# EAGLE board Board_proiect_ (EAGLE 9.7.0)
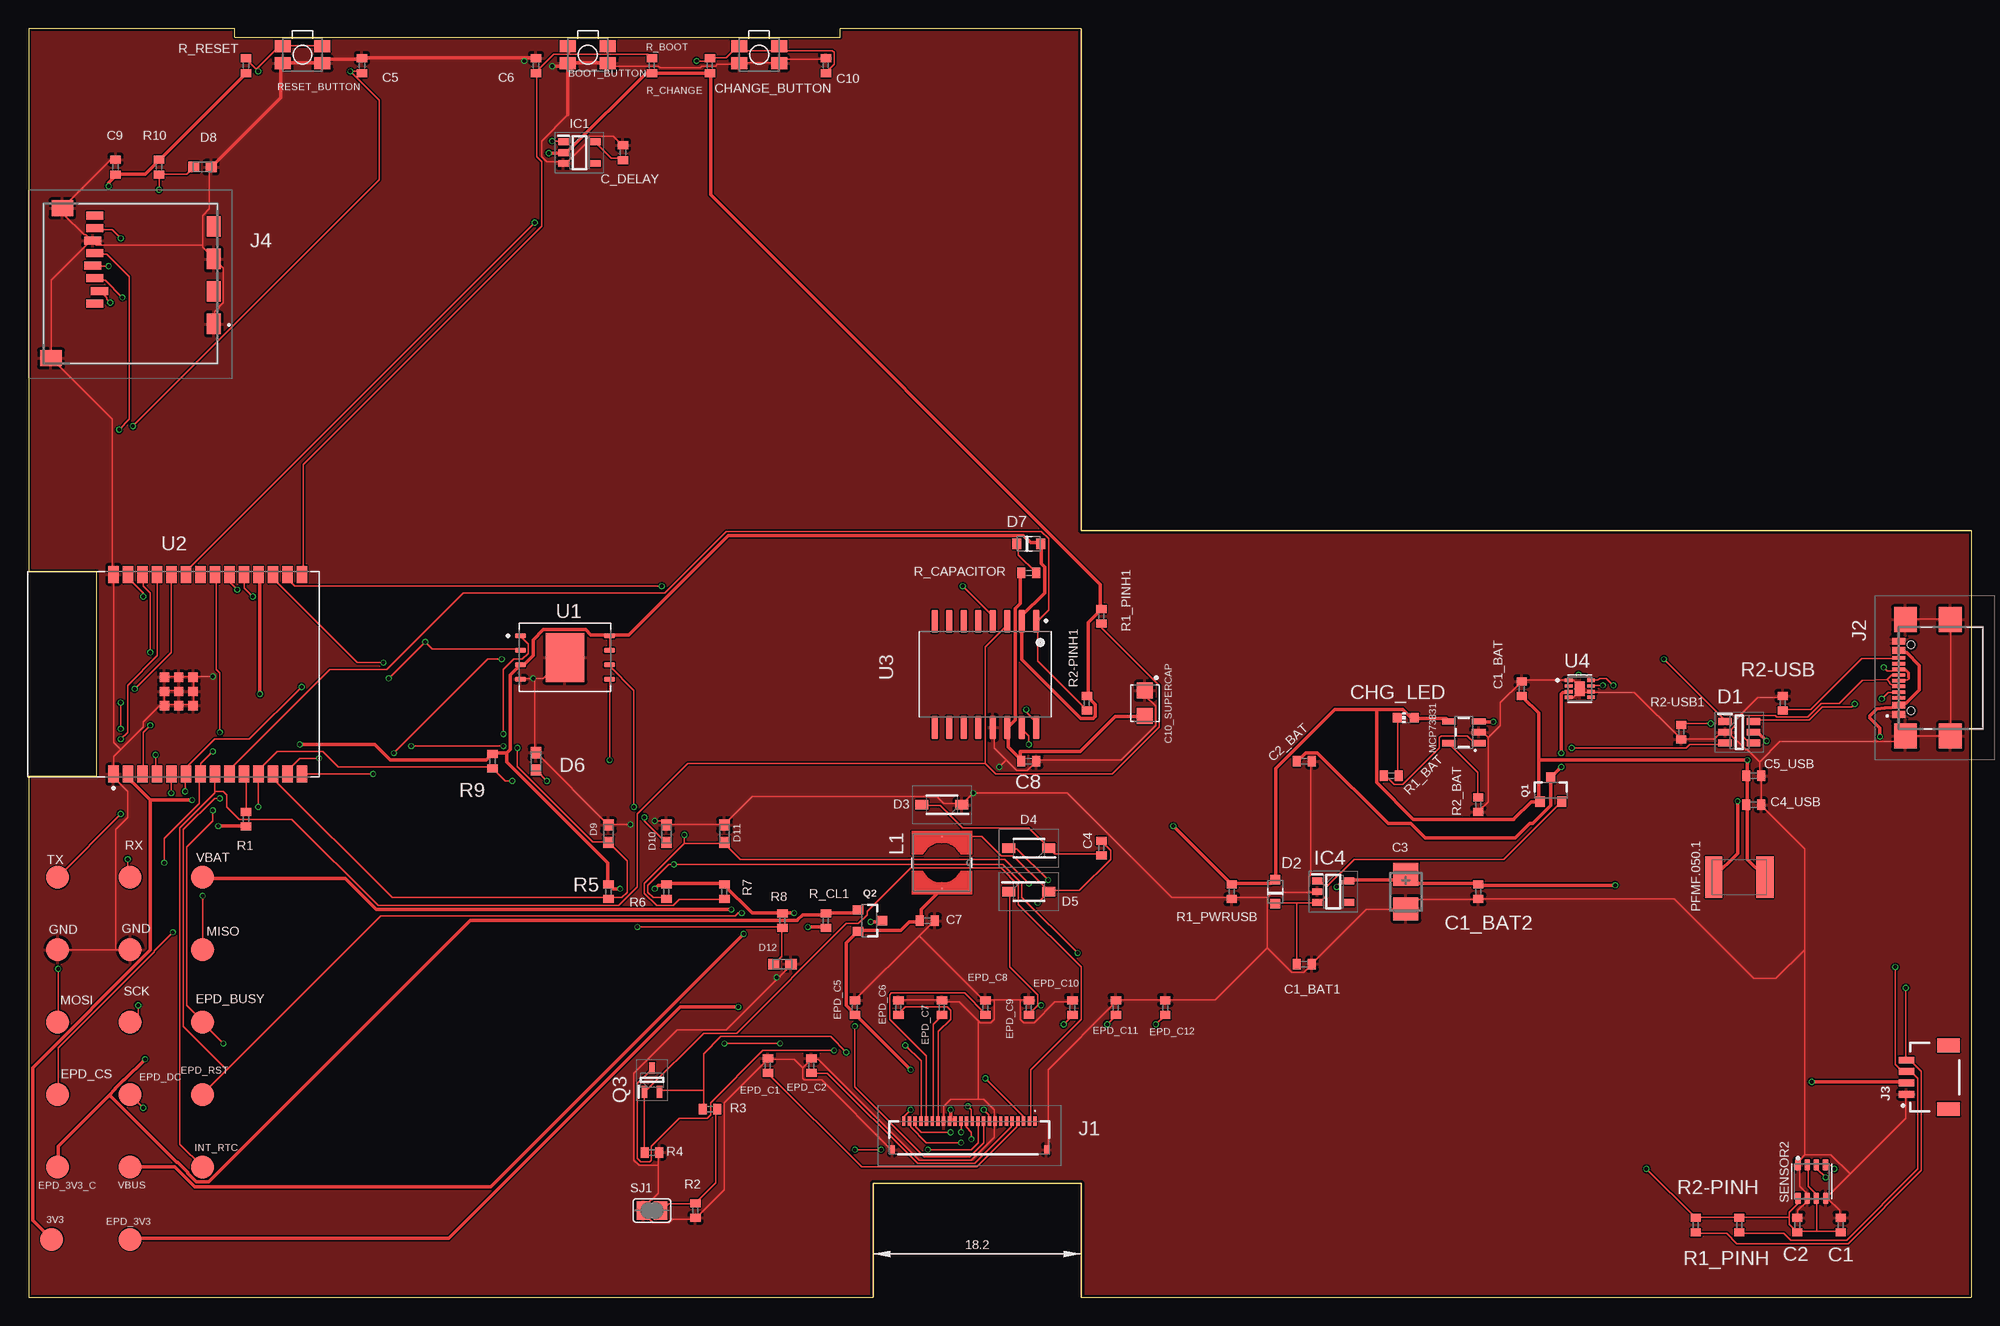
[diagram p0: board, top side]
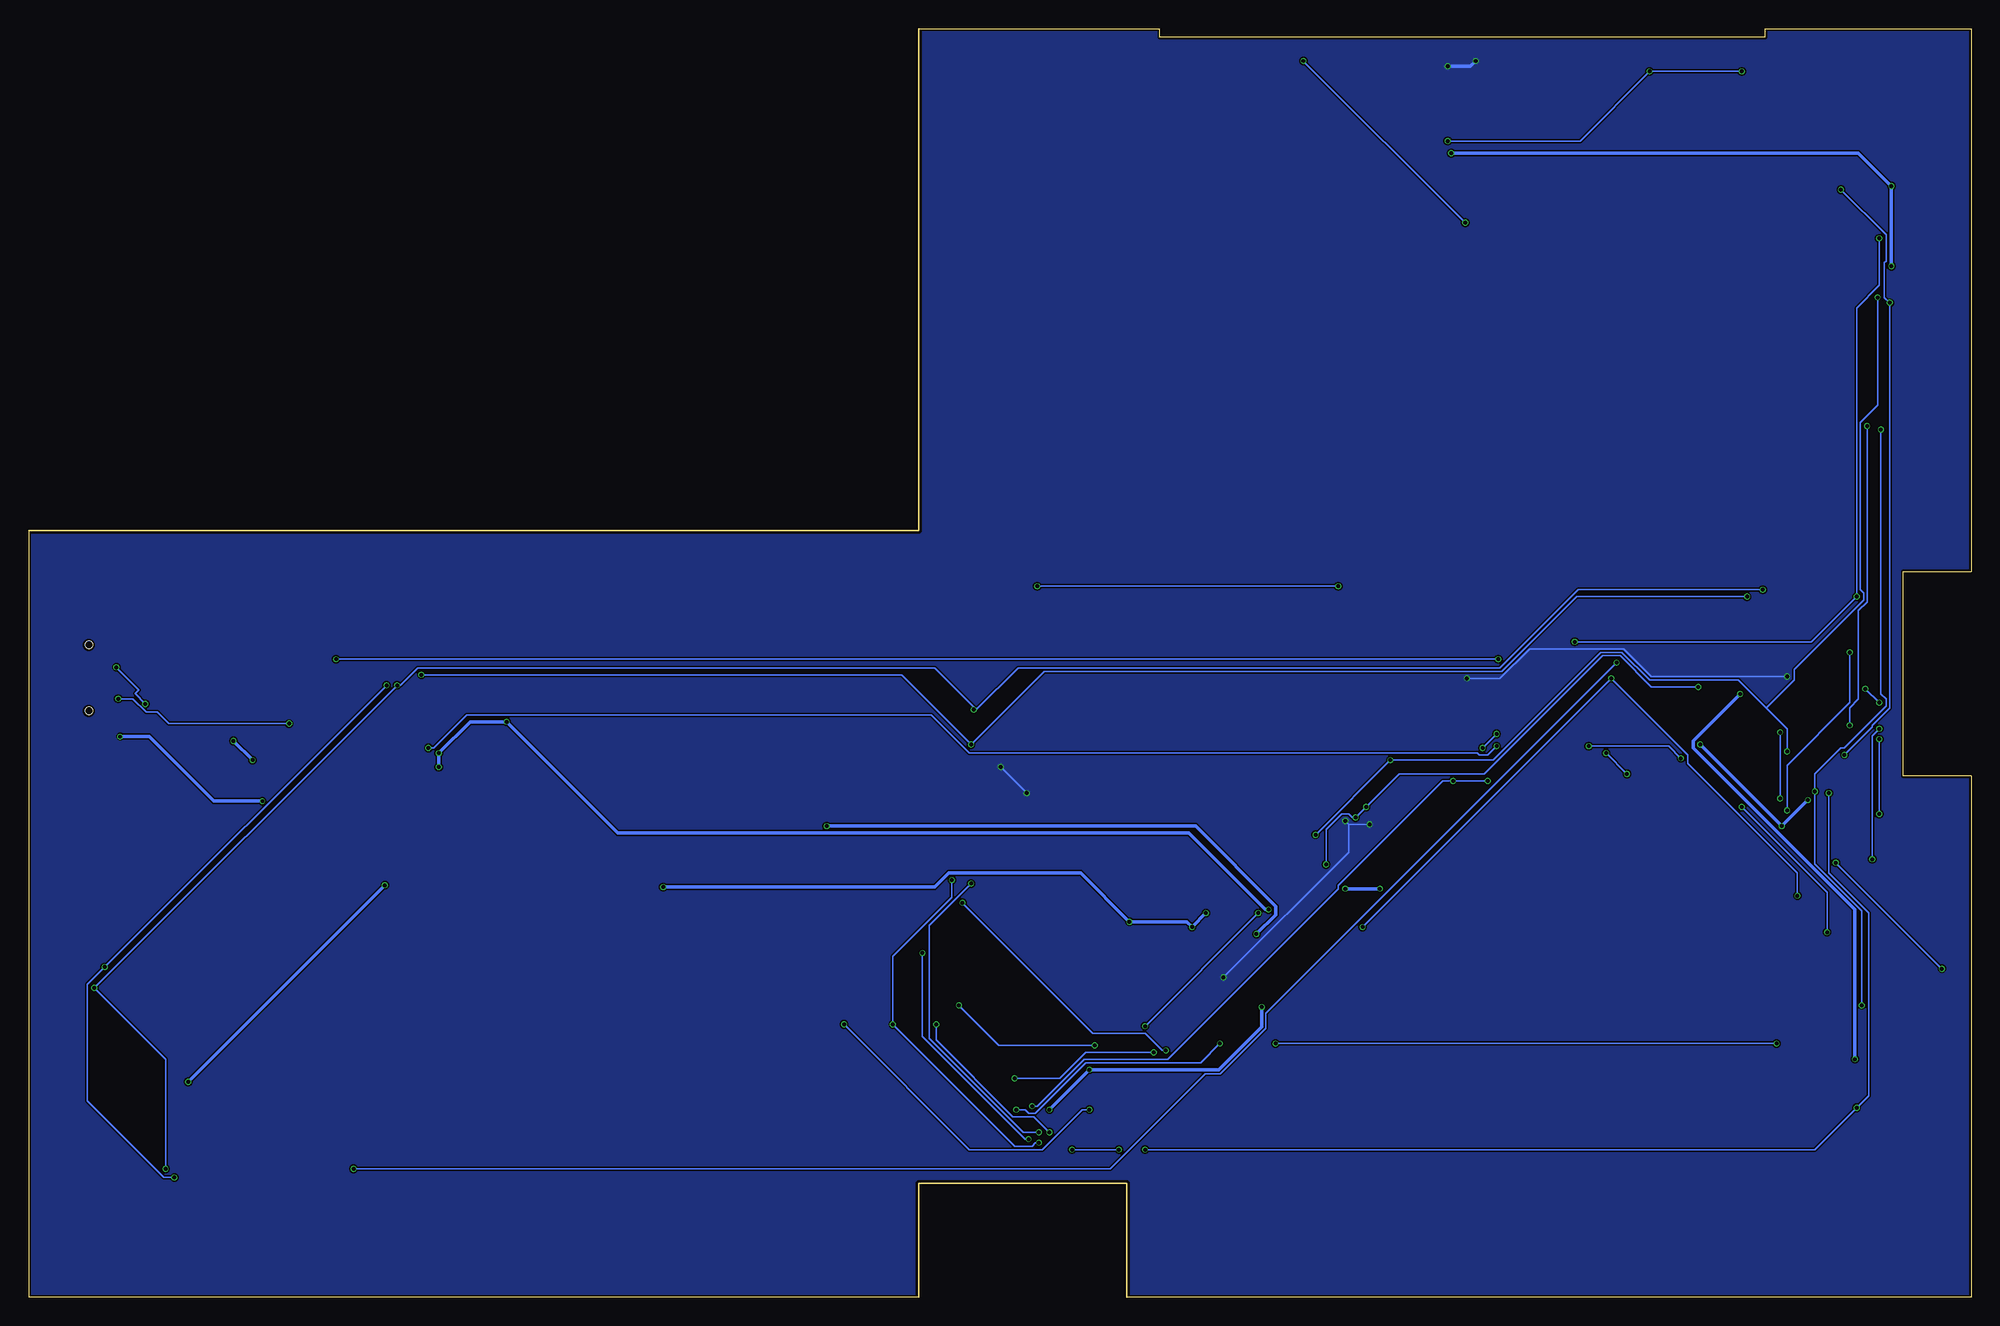
[diagram p1: board, bottom side, seen from below]

Size 170.2 x 111.2 mm. Coordinates in mm from the lower left corner, seen from the top.
Outline: 0,0 74,0 74,10 92.2,10 92.2,0 170.2,0 170.2,67.2 92.2,67.2 92.2,111.2 71.12,111.2 71.12,110.42 18.08,110.42 18.08,111.2 0,111.2 0,63.6 5.97,63.6 5.97,45.72 0,45.72 0,0
Copper layers (1*16): Top 0.035mm / dielectric 1.6mm / Bottom 0.035mm
Design rules "jlcpcb-2layers.dru *": minimum track width 5mil, minimum drill 0.3mm, track to track 5mil, track to pad 5mil, pad to pad 5mil, via to via 5mil, smd to smd 5mil, copper to edge 0.2mm, drill to drill 6mil, minimum pad ring 10mil, minimum via ring 3mil, stop-mask expansion 4mil, vias tented up to drill 0mil, thermal gap 10mil

## Footprints (pad centres in the part's own frame; a part is rotated, then mirrored left to right if it is on the bottom)
MYBUTTON = smd 1.4 x 1.05: 1 1.75,0.75; 2 -1.75,0.75; 3 -1.75,-0.75; 4 1.75,-0.75
ESP32_WROVER_EAGLE-LTSPICE_C0402 = smd 0.7 x 0.9: 1 -0.65,0; 2 0.65,0
EAGLE-LTSPICE_C0402 = smd 0.7 x 0.9: 1 -0.65,0; 2 0.65,0
RCL_CT3528 = smd 2 x 2.2: + -1.5,0; - 1.5,0
CAPCP3225X100N = smd 1.4 x 1.4: 1 -1.1,0; 2 1.1,0
ADAFRUIT_CHIP-LED0603 = smd 0.8 x 0.8: A 0,-0.75; C 0,0.75
SOT95P280X145-6N = smd 1.2 x 0.6: 1 -1.25,0.95; 2 -1.25,0; 3 -1.25,-0.95; 4 1.25,-0.95; 5 1.25,0; 6 1.25,0.95
ESP32_WROVER_AVX---SD0805S020S1R0_AVX_SD0805S020S1R0_0 = smd 0.8 x 0.9: 1 -1.05,0; 2 1.05,0
SOD3716X135N = smd 1.15 x 0.8: 1 -1.75,0; 2 1.75,0
DIOC1608X36N = smd 0.97 x 0.94: 1 -0.75,0; 2 0.75,0
SOT95P280X125-5N = smd 0.9 x 0.6: 1 -1.4,0.95; 2 -1.4,0; 3 -1.4,-0.95; 4 1.4,-0.95; 5 1.4,0.95
SOT95P280X120-5N = smd 0.9 x 0.6: 1 -1.4,0.95; 2 -1.4,0; 3 -1.4,-0.95; 4 1.4,-0.95; 5 1.4,0.95
FH34SRJ24S05SH99 = smd 0.3 x 0.8: 1 5.75,1.45; 2 5.25,1.45; 3 4.75,1.45; 4 4.25,1.45; 5 3.75,1.45; 6 3.25,1.45; 7 2.75,1.45; 8 2.25,1.45; 9 1.75,1.45; 10 1.25,1.45; 11 0.75,1.45; 12 0.25,1.45; 13 -0.25,1.45; 14 -0.75,1.45; 15 -1.25,1.45; 16 -1.75,1.45; 17 -2.25,1.45; 18 -2.75,1.45; 19 -3.25,1.45; 20 -3.75,1.45; 21 -4.25,1.45; 22 -4.75,1.45; 23 -5.25,1.45; 24 -5.75,1.45 | smd 0.4 x 0.8: MP1 6.75,-1.05; MP2 -6.75,-1.05
SAMACSYS_PARTS_USB4110GFA = smd 0.3 x 1.15: A1 -3.35,3.678; A4 -2.55,3.678; A5 -1.25,3.678; A6 -0.25,3.678; A7 0.25,3.678; A8 1.25,3.678; A9 2.55,3.678; A12 3.35,3.678; B1 3.05,3.678; B4 2.25,3.678; B5 1.75,3.678; B6 0.75,3.678; B7 -0.75,3.678; B8 -1.75,3.678; B9 -2.25,3.678; B12 -3.05,3.678 | smd 2.18 x 2: MP1 -5.11,-0.827; MP2 5.11,-0.827; MP3 -5.11,3.103; MP4 5.11,3.103 | hole 0.65: -2.89,2.603; 2.89,2.603
JST04_1MM_RA = smd 0.6 x 1.35: 1 -1.5,0; 2 -0.5,0; 3 0.5,0; 4 1.5,0 | smd 1.2 x 2: NC1 2.8,-3.675; NC2 -2.8,-3.675
112ATAARR03ATTEND = smd 1.8 x 1.2: G1 10.6,10.4; G2 4.9,10.4; S1 7.75,10.4; S2 2.05,10.4 | smd 1.4 x 1.9: G3 13.6,-3.85; G4 0.45,-2.85 | smd 0.7 x 1.5: P1 8.8,0; P2 7.7,0.4; P3 6.6,0; P4 5.5,-0.2; P5 4.4,0; P6 3.3,-0.2; P7 2.2,0; P8 1.1,0
IND_4828-WE-TPC_WRE = smd 0.127 x 0.127: 1 -2.286,0; 2 2.286,0
ESP32_WROVER_SPARKFUN-IC-POWER_SOT23-5 = smd 0.55 x 1.2: 1 -0.95,-1.3; 2 0,-1.3; 3 0.95,-1.3; 4 0.95,1.3; 5 -0.95,1.3
ESP32C6_VARISTOR_CT/CN1812 = smd 1.5 x 3.6: 1 -2.25,0; 2 2.25,0
ESP32_WROVER_SPARKFUN-DISCRETESEMI_SOT23-3 = smd 0.8 x 0.9: 1 -0.95,-1; 2 0.95,-1; 3 0,1.1
SOT65P210X110-3N = smd 1.05 x 0.5: 1 -1.05,0.65; 2 -1.05,-0.65; 3 1.05,0
ESP32_WROVER_EAGLE-LTSPICE_R0402 = smd 0.7 x 0.9: 1 -0.65,0; 2 0.65,0
ESP32_WROVER_BME680_PSON80P300X300X100-8N = smd 1.016 x 0.5: 1 1.458,1.2; 2 1.458,0.4; 3 1.458,-0.4; 4 1.458,-1.2; 5 -1.458,-1.22; 6 -1.458,-0.4; 7 -1.458,0.4; 8 -1.458,1.2
SJ = smd 1.168 x 1.6: 1 -0.762,0; 2 0.762,0
TP20R = smd 2 x 2: TP 0,0
SON127P600X800X80-9N = smd 0.94 x 0.44: 1 -3.895,1.905; 2 -3.895,0.635; 3 -3.895,-0.635; 4 -3.895,-1.905; 5 3.895,-1.905; 6 3.895,-0.635; 7 3.895,0.635; 8 3.895,1.905 | smd 3.4 x 4.3: 9 0,0
XCVR_ESP32-C6-WROOM-1-N8 = smd 1.5 x 0.9: 1 -8.75,5.26; 2 -8.75,3.99; 3 -8.75,2.72; 4 -8.75,1.45; 5 -8.75,0.18; 6 -8.75,-1.09; 7 -8.75,-2.36; 8 -8.75,-3.63; 9 -8.75,-4.9; 10 -8.75,-6.17; 11 -8.75,-7.44; 12 -8.75,-8.71; 13 -8.75,-9.98; 14 -8.75,-11.25; 15 8.75,-11.25; 16 8.75,-9.98; 17 8.75,-8.71; 18 8.75,-7.44; 19 8.75,-6.17; 20 8.75,-4.9; 21 8.75,-3.63; 22 8.75,-2.36; 23 8.75,-1.09; 24 8.75,0.18; 25 8.75,1.45; 26 8.75,2.72; 27 8.75,3.99; 28 8.75,5.26 | smd 0.8 x 0.8: 29_1 -2.755,0.79; 29_2 -1.505,0.79; 29_3 -0.255,0.79; 29_4 -2.755,-0.46; 29_5 -1.505,-0.46; 29_6 -0.255,-0.46; 29_7 -2.755,-1.71; 29_8 -1.505,-1.71; 29_9 -0.255,-1.71
SOIC127P1032X265-16N = smd 2.05 x 0.59: 1 -4.655,4.445; 2 -4.655,3.175; 3 -4.655,1.905; 4 -4.655,0.635; 5 -4.655,-0.635; 6 -4.655,-1.905; 7 -4.655,-3.175; 8 -4.655,-4.445; 9 4.655,-4.445; 10 4.655,-3.175; 11 4.655,-1.905; 12 4.655,-0.635; 13 4.655,0.635; 14 4.655,1.905; 15 4.655,3.175; 16 4.655,4.445
SON50P200X200X80-9N = smd 0.76 x 0.27: 1 -0.985,0.75; 2 -0.985,0.25; 3 -0.985,-0.25; 4 -0.985,-0.75; 5 0.985,-0.75; 6 0.985,-0.25; 7 0.985,0.25; 8 0.985,0.75 | smd 0.9 x 1.3: 9 0,0

## Placement (x,y rotation side)
BOOT_BUTTON  BUTTON_CUSYOMV1  [MYBUTTON]  49,108.91 180 top
C1  100nF  [ESP32_WROVER_EAGLE-LTSPICE_C0402]  158.75,6.35 90 top
C1_BAT  4.7uF  [ESP32_WROVER_EAGLE-LTSPICE_C0402]  130.81,53.34 90 top
C1_BAT1  4.7uF  [ESP32_WROVER_EAGLE-LTSPICE_C0402]  111.76,29.21 0 top
C1_BAT2  4.7uF  [EAGLE-LTSPICE_C0402]  127,35.56 270 top
C2  100nF  [ESP32_WROVER_EAGLE-LTSPICE_C0402]  154.94,6.35 90 top
C2_BAT  4.7uF  [ESP32_WROVER_EAGLE-LTSPICE_C0402]  111.76,46.99 0 top
C3  100uF TANT  [RCL_CT3528]  120.65,35.56 270 top
C4  4.7uF/25V  [ESP32_WROVER_EAGLE-LTSPICE_C0402]  93.98,39.37 90 top
C4_USB  100nF  [ESP32_WROVER_EAGLE-LTSPICE_C0402]  151.13,43.18 0 top
C5  1uF  [ESP32_WROVER_EAGLE-LTSPICE_C0402]  29.21,107.95 90 top
C5_USB  4.7uF  [ESP32_WROVER_EAGLE-LTSPICE_C0402]  151.13,45.72 0 top
C6  100nF  [ESP32_WROVER_EAGLE-LTSPICE_C0402]  44.45,107.95 90 top
C7  10uF  [ESP32_WROVER_EAGLE-LTSPICE_C0402]  78.74,33.02 0 top
C8  100nF  [ESP32_WROVER_EAGLE-LTSPICE_C0402]  87.63,46.99 0 top
C9  100nF  [ESP32_WROVER_EAGLE-LTSPICE_C0402]  7.62,99.06 90 top
C10  100nF  [ESP32_WROVER_EAGLE-LTSPICE_C0402]  69.85,107.95 90 top
C10_SUPERCAP  CPH3225A  [CAPCP3225X100N]  97.79,52.07 270 top
C_DELAY  100nF  [ESP32_WROVER_EAGLE-LTSPICE_C0402]  52.07,100.33 90 top
CHANGE_BUTTON  BUTTON_CUSYOMV1  [MYBUTTON]  64,108.91 180 top
CHG_LED  [ADAFRUIT_CHIP-LED0603]  120.65,50.8 90 top
D1  USBLC6-2SC6Y  [SOT95P280X145-6N]  149.86,49.53 0 top
D2  ESP32_WROVER_AVX---SD0805S020S1R0_AVX_SD0805S020S1R0_0_0AVX_SD0805S020S1R0_0_0  [ESP32_WROVER_AVX---SD0805S020S1R0_AVX_SD0805S020S1R0_0]  109.22,35.56 90 top
D3  MBR0530  [SOD3716X135N]  80.01,43.18 180 top
D4  MBR0530  [SOD3716X135N]  87.63,39.37 180 top
D5  MBR0530  [SOD3716X135N]  87.63,35.56 0 top
D6  PGB1010603MR  [DIOC1608X36N]  44.45,46.99 90 top
D7  ESP32_WROVER_AVX---SD0805S020S1R0_AVX_SD0805S020S1R0_0_0AVX_SD0805S020S1R0_0_0  [ESP32_WROVER_AVX---SD0805S020S1R0_AVX_SD0805S020S1R0_0]  87.63,66.04 0 top
D8  PGB1010603MR  [DIOC1608X36N]  15.24,99.06 0 top
D9  PGB1010603MR  [DIOC1608X36N]  50.8,40.64 90 top
D10  PGB1010603MR  [DIOC1608X36N]  55.88,40.64 90 top
D11  PGB1010603MR  [DIOC1608X36N]  60.96,40.64 90 top
D12  PGB1010603MR  [DIOC1608X36N]  66.04,29.21 0 top
EPD_C1  1uF/50V  [ESP32_WROVER_EAGLE-LTSPICE_C0402]  64.77,20.32 90 top
EPD_C2  1uF/50V  [ESP32_WROVER_EAGLE-LTSPICE_C0402]  68.58,20.32 90 top
EPD_C5  0.1uF/50V  [ESP32_WROVER_EAGLE-LTSPICE_C0402]  72.39,25.4 90 top
EPD_C6  1uF/50V  [ESP32_WROVER_EAGLE-LTSPICE_C0402]  76.2,25.4 90 top
EPD_C7  1uF/50V  [ESP32_WROVER_EAGLE-LTSPICE_C0402]  80.01,25.4 90 top
EPD_C8  1uF/50V  [ESP32_WROVER_EAGLE-LTSPICE_C0402]  83.82,25.4 90 top
EPD_C9  1uF/50V  [ESP32_WROVER_EAGLE-LTSPICE_C0402]  87.63,25.4 90 top
EPD_C10  1uF/50V  [ESP32_WROVER_EAGLE-LTSPICE_C0402]  91.44,25.4 90 top
EPD_C11  1uF/50V  [ESP32_WROVER_EAGLE-LTSPICE_C0402]  95.25,25.4 90 top
EPD_C12  1uF/50V  [ESP32_WROVER_EAGLE-LTSPICE_C0402]  99.58,25.4 90 top
IC1  BD5229G-TR  [SOT95P280X125-5N]  48.26,100.33 0 top
IC4  XC6220A331MR-G  [SOT95P280X120-5N]  114.3,35.56 0 top
J1  FH34SRJ-24S-0.5SH_99_  [FH34SRJ24S05SH99]  82.42,14 0 top
J2  SAMACSYS_PARTS_USB4110-GF-A  [SAMACSYS_PARTS_USB4110GFA]  167.52,54.3 90 top
J3  QWIIC_RIGHT_ANGLE  [JST04_1MM_RA]  164.51,19.3 90 top
J4  112A-TAAR-R03_ATTEND  [112ATAARR03ATTEND]  5.82,95.9 270 top
L1  68uH  [IND_4828-WE-TPC_WRE]  80.01,38.1 270 top
MCP73831  MCP73831  [ESP32_WROVER_SPARKFUN-IC-POWER_SOT23-5]  125.73,49.53 90 top
PFMF.050.1  ESP32C6_VARISTORCN1812  [ESP32C6_VARISTOR_CT/CN1812]  149.86,36.83 0 top
Q1  20V/4.2A/52mΩ/1.4W  [ESP32_WROVER_SPARKFUN-DISCRETESEMI_SOT23-3]  133.35,44.45 0 top
Q2  20V/4.2A/52mΩ/1.4W  [ESP32_WROVER_SPARKFUN-DISCRETESEMI_SOT23-3]  73.66,33.02 270 top
Q3  SI1308EDL-T1-GE3  [SOT65P210X110-3N]  54.61,19.05 90 top
R1  10K  [ESP32_WROVER_EAGLE-LTSPICE_R0402]  19.05,41.91 90 top
R1_BAT  200  [ESP32_WROVER_EAGLE-LTSPICE_R0402]  119.38,45.72 0 top
R1_PINH  10K  [ESP32_WROVER_EAGLE-LTSPICE_R0402]  149.86,6.35 90 top
R1_PINH1  10K  [ESP32_WROVER_EAGLE-LTSPICE_R0402]  93.98,59.69 90 top
R1_PWRUSB  100K  [ESP32_WROVER_EAGLE-LTSPICE_R0402]  105.41,35.56 90 top
R2  2.2  [ESP32_WROVER_EAGLE-LTSPICE_R0402]  58.42,7.62 90 top
R2-PINH  10K  [ESP32_WROVER_EAGLE-LTSPICE_R0402]  146.05,6.35 90 top
R2-PINH1  10K  [ESP32_WROVER_EAGLE-LTSPICE_R0402]  92.71,52.07 90 top
R2-USB  5K1  [ESP32_WROVER_EAGLE-LTSPICE_R0402]  153.67,52.07 90 top
R2-USB1  5K1  [ESP32_WROVER_EAGLE-LTSPICE_R0402]  144.78,49.53 90 top
R2_BAT  2K  [ESP32_WROVER_EAGLE-LTSPICE_R0402]  127,43.18 90 top
R3  0.47  [ESP32_WROVER_EAGLE-LTSPICE_R0402]  59.69,16.51 0 top
R4  10K  [ESP32_WROVER_EAGLE-LTSPICE_R0402]  54.61,12.7 0 top
R5  10K  [ESP32_WROVER_EAGLE-LTSPICE_R0402]  50.8,35.56 90 top
R6  10K  [ESP32_WROVER_EAGLE-LTSPICE_R0402]  55.88,35.56 90 top
R7  10K  [ESP32_WROVER_EAGLE-LTSPICE_R0402]  60.96,35.56 90 top
R8  10K  [ESP32_WROVER_EAGLE-LTSPICE_R0402]  66.04,33.02 90 top
R9  10K  [ESP32_WROVER_EAGLE-LTSPICE_R0402]  40.64,46.99 90 top
R10  10K  [ESP32_WROVER_EAGLE-LTSPICE_R0402]  11.43,99.06 90 top
R_BOOT  10K  [ESP32_WROVER_EAGLE-LTSPICE_R0402]  54.61,107.95 90 top
R_CAPACITOR  15  [ESP32_WROVER_EAGLE-LTSPICE_R0402]  87.63,63.5 180 top
R_CHANGE  10K  [ESP32_WROVER_EAGLE-LTSPICE_R0402]  59.69,107.95 90 top
R_CL1  10K  [ESP32_WROVER_EAGLE-LTSPICE_R0402]  69.85,33.02 90 top
R_RESET  10K  [ESP32_WROVER_EAGLE-LTSPICE_R0402]  19.05,107.95 90 top
RESET_BUTTON  BUTTON_CUSYOMV1  [MYBUTTON]  24,108.91 180 top
SENSOR2  BME688  [ESP32_WROVER_BME680_PSON80P300X300X100-8N]  156.21,10.16 90 top
SJ1  [SJ]  54.61,7.62 0 top
TP1  TPTP20R  [TP20R]  2.54,36.83 0 top
TP2  TPTP20R  [TP20R]  8.89,36.83 0 top
TP3  TPTP20R  [TP20R]  15.24,36.83 0 top
TP4  TPTP20R  [TP20R]  2.54,30.48 0 top
TP5  TPTP20R  [TP20R]  8.89,30.48 0 top
TP6  TPTP20R  [TP20R]  15.24,30.48 0 top
TP7  TPTP20R  [TP20R]  2.54,24.13 0 top
TP8  TPTP20R  [TP20R]  8.89,24.13 0 top
TP9  TPTP20R  [TP20R]  15.24,24.13 0 top
TP10  TPTP20R  [TP20R]  2.54,17.78 0 top
TP11  TPTP20R  [TP20R]  8.89,17.78 0 top
TP12  TPTP20R  [TP20R]  15.24,17.78 0 top
TP13  TPTP20R  [TP20R]  2.54,11.43 0 top
TP14  TPTP20R  [TP20R]  8.89,11.43 0 top
TP15  TPTP20R  [TP20R]  15.24,11.43 0 top
TP16  TPTP20R  [TP20R]  2.02,5.08 0 top
TP17  TPTP20R  [TP20R]  8.89,5.08 0 top
U1  W25Q512JVEIQ  [SON127P600X800X80-9N]  46.99,56.09 0 top
U2  ESP32-C6-WROOM-1-N8  [XCVR_ESP32-C6-WROOM-1-N8]  12.7,54.61 90 top
U3  DS3231SN#  [SOIC127P1032X265-16N]  83.82,54.61 270 top
U4  MAX17048G+T10  [SON50P200X200X80-9N]  135.89,53.34 0 top

## Library data of the parts
BOOT_BUTTON CHANGE_BUTTON CHG_LED PFMF.050.1 RESET_BUTTON SJ1 TP1-TP17 = DeskAssistant v19 v1
C1 C1_BAT C1_BAT1 C1_BAT2 C2 C2_BAT C4 C4_USB C5 C5_USB C6-C10 C_DELAY EPD_C1 EPD_C2 EPD_C5-EPD_C12 = DeskAssistant v19 v1; SPICEMODEL: NONE; SPICEPREFIX: C
C3 = DeskAssistant v19 v1; SPICEPREFIX: C
C10_SUPERCAP = DeskAssistant v19 v1; AVAILABILITY: Not in stock; CHECK_PRICES: https://www.snapeda.com/parts/CPH3225A/Seiko+Instruments/view-part/?ref=eda; DESCRIPTION: 11 mF (EDLC) Supercapacitor 3.3 V 1210 (3225 Metric) - -; MF: Seiko Instruments; MP: CPH3225A; PACKAGE: 1210 Seiko; PRICE: None; PURCHASE-URL: https://www.snapeda.com/api/url_track_click_mouser/?unipart_id=562593&manufacturer=Seiko Instruments&part_name=CPH3225A&search_term=None; SNAPEDA_LINK: https://www.snapeda.com/parts/CPH3225A/Seiko+Instruments/view-part/?ref=snap
D1 = DeskAssistant v19 v1; AVAILABILITY: In Stock; CHECK_PRICES: https://www.snapeda.com/parts/USBLC6-2SC6Y/STMicroelectronics/view-part/?ref=eda; DESCRIPTION: 17V Clamp 5A (8/20µs) Ipp Tvs Diode Surface Mount SOT-23-6; MF: STMicroelectronics; MP: USBLC6-2SC6Y; PACKAGE: SOT-23-6 STMicroelectronics; PRICE: None; SNAPEDA_LINK: https://www.snapeda.com/parts/USBLC6-2SC6Y/STMicroelectronics/view-part/?ref=snap
D2 D7 = DeskAssistant v19 v1; CENTROID_NOT_SPECIFIED: No; DATASHEET: http://datasheets.avx.com/schottky.pdf; DIGIKEY_DESCRIPTION: DIODE SCHOTTKY 20V 1A 0805; DIGIKEY_PART_NUMBER: 478-7800-1-ND; LEAD_FREE: yes; MF: AVX; MOUSER_PART_NUMBER: 581-SD0805S020S1R0; PACKAGE: 0805 (2012 metric); PREFIX: D; ROHS: yes; TEMPERATURE_RANGE_HIGH: +125°C; TEMPERATURE_RANGE_LOW: -55°C
D3-D5 = DeskAssistant v19 v1; AVAILABILITY: In Stock; CHECK_PRICES: https://www.snapeda.com/parts/MBR0530/Onsemi/view-part/?ref=eda; DESCRIPTION: Diode Schottky 30 V 500mA Surface Mount SOD-123; MF: ON Semiconductor; MP: MBR0530; PACKAGE: SOD-123-2 ON Semiconductor; PRICE: None; PURCHASE-URL: https://www.snapeda.com/api/url_track_click_mouser/?unipart_id=179458&manufacturer=ON Semiconductor&part_name=MBR0530&search_term=None; SNAPEDA_LINK: https://www.snapeda.com/parts/MBR0530/Onsemi/view-part/?ref=snap
D6 D8-D12 = DeskAssistant v19 v1; AVAILABILITY: In Stock; CHECK_PRICES: https://www.snapeda.com/parts/PGB1010603MR/Littelfuse/view-part/?ref=eda; DESCRIPTION: 150V (Typ) Clamp - Ipp Tvs Diode Surface Mount 0603 (1608 Metric); MF: Littelfuse Inc.; MP: PGB1010603MR; PACKAGE: 0603 Littelfuse Inc.; PRICE: None; PURCHASE-URL: https://www.snapeda.com/api/url_track_click_mouser/?unipart_id=5659453&manufacturer=Littelfuse Inc.&part_name=PGB1010603MR&search_term=None; SNAPEDA_LINK: https://www.snapeda.com/parts/PGB1010603MR/Littelfuse/view-part/?ref=snap
IC1 = DeskAssistant v19 v1; DESCRIPTION: Voltage Detector with Adjustable Delay Time: CMOS processes are utilized to develop high precision, low current consumption CMOS reset ICs that allow arbitrary setting of the delay time. The extensive lineup includes both Nch Open Drain and CMOS output types in a wide range of detection voltages (from 2.3V to 6.0V, in 0.1V steps), enabling selection of the ideal solution based on customer requirements. In addition, the entire series is of course both lead-free and RoHS-compliant.; HEIGHT: 1.25mm; MANUFACTURER_NAME: ROHM Semiconductor; MANUFACTURER_PART_NUMBER: BD5229G-TR; MOUSER_PART_NUMBER: 755-BD5229G-TR; MOUSER_PRICE-STOCK: https://www.mouser.co.uk/ProductDetail/ROHM-Semiconductor/BD5229G-TR?qs=4kLU8WoGk0vvnhrrYwdszw%3D%3D
IC4 = DeskAssistant v19 v1; DESCRIPTION: LDO Voltage Regulators; HEIGHT: 1.2mm; MANUFACTURER_NAME: Torex; MANUFACTURER_PART_NUMBER: XC6220A331MR-G; MOUSER_PART_NUMBER: 865-XC6220A331MR-G; MOUSER_PRICE-STOCK: https://www.mouser.co.uk/ProductDetail/Torex-Semiconductor/XC6220A331MR-G?qs=AsjdqWjXhJ8ZSWznL1J0gg%3D%3D
J1 = DeskAssistant v19 v1; DESCRIPTION: 24 Position FFC, FPC Connector Contacts, Top and Bottom 0.020" (0.50mm) Surface Mount, Right Angle; HEIGHT: 1.1mm; MANUFACTURER_NAME: Hirose; MANUFACTURER_PART_NUMBER: FH34SRJ-24S-0.5SH(99); MOUSER_PART_NUMBER: 798-FH34SRJ24S05SH99; MOUSER_PRICE-STOCK: https://www.mouser.co.uk/ProductDetail/Hirose-Connector/FH34SRJ-24S-0.5SH99?qs=vcbW%252B4%252BSTIpKBl5ap9J8Fw%3D%3D
J2 = DeskAssistant v19 v1; DESCRIPTION: CONN USB 2.0 TYPE-C R/A SMT; HEIGHT: 3.26mm; MANUFACTURER_NAME: GCT (GLOBAL CONNECTOR TECHNOLOGY); MANUFACTURER_PART_NUMBER: USB4110-GF-A; MOUSER_PART_NUMBER: 640-USB4110-GF-A; MOUSER_PRICE-STOCK: https://www.mouser.co.uk/ProductDetail/GCT/USB4110-GF-A?qs=KUoIvG%2F9IlYiZvIXQjyJeA%3D%3D
J3 = DeskAssistant v19 v1; PROD_ID: CONN-13694
J4 = DeskAssistant v19 v1; DESCRIPTION: Micro SD Card Socket, Push-Push Type, Top Mount, SMT, H=1.83mm, 10u; HEIGHT: 1.9mm; MANUFACTURER_NAME: ATTEND; MANUFACTURER_PART_NUMBER: 112A-TAAR-R03 ATTEND
L1 = DeskAssistant v19 v1; COPYRIGHT: Copyright (C) 2024 Ultra Librarian. All rights reserved.; MANUFACTURER_PART_NUMBER: 744043680; MFR_NAME: Wurth Electronics
MCP73831 = DeskAssistant v19 v1; PROD_ID: IC-09995
Q1 Q2 = DeskAssistant v19 v1; PROD_ID: TRAN-14388
Q3 = DeskAssistant v19 v1; AVAILABILITY: In Stock; CHECK_PRICES: https://www.snapeda.com/parts/SI1308EDL-T1-GE3/Vishay+Siliconix/view-part/?ref=eda; DESCRIPTION: Si1308EDL-T1-GE3 N-channel MOSFET Transistor, 1.5 A, 30 V, 3-Pin SC-70 | Siliconix / Vishay SI1308EDL-T1-GE3; MF: Vishay Siliconix; MP: SI1308EDL-T1-GE3; PACKAGE: SOT-323 Vishay Semiconductor; PRICE: None; PURCHASE-URL: https://www.snapeda.com/api/url_track_click_mouser/?unipart_id=274603&manufacturer=Vishay Siliconix&part_name=SI1308EDL-T1-GE3&search_term=None; SNAPEDA_LINK: https://www.snapeda.com/parts/SI1308EDL-T1-GE3/Vishay+Siliconix/view-part/?ref=snap
R1 R1_BAT R1_PINH R1_PINH1 R1_PWRUSB R2 R2-PINH R2-PINH1 R2-USB R2-USB1 R2_BAT R3-R10 R_BOOT R_CAPACITOR R_CHANGE R_CL1 R_RESET = DeskAssistant v19 v1; SPICEMODEL: NONE; SPICEPREFIX: R
SENSOR2 = DeskAssistant v19 v1; AVAILABILITY: Unavailable; DESCRIPTION: Integrated Environmental Unit; MF: Bosch Sensortec; MP: BME680; PACKAGE: LGA-8 Bosch Tools; PRICE: None
U1 = DeskAssistant v19 v1; AVAILABILITY: In Stock; CHECK_PRICES: https://www.snapeda.com/parts/W25Q512JVEIQ/Winbond+Electronics/view-part/?ref=eda; DESCRIPTION: FLASH - NOR Memory IC 512Mb (64M x 8) SPI - Quad I/O 133 MHz 8-WSON (8x6); MF: Winbond Electronics; MP: W25Q512JVEIQ; PACKAGE: Package; PRICE: None; SNAPEDA_LINK: https://www.snapeda.com/parts/W25Q512JVEIQ/Winbond+Electronics/view-part/?ref=snap
U2 = DeskAssistant v19 v1; AVAILABILITY: In Stock; CHECK_PRICES: https://www.snapeda.com/parts/ESP32-C6-WROOM-1-N8/Espressif+Systems/view-part/?ref=eda; DESCRIPTION: Multiprotocol Modules ESP32-C6 module, Wi-Fi 6 in 2.4 GHz band, Bluetooth 5, Zigbee 3.0 and Thread. ESP34-WROOM Compatible - ENGINEERING SAMPLE; MF: Espressif Systems; MP: ESP32-C6-WROOM-1-N8; PACKAGE: None; PRICE: None; SNAPEDA_LINK: https://www.snapeda.com/parts/ESP32-C6-WROOM-1-N8/Espressif+Systems/view-part/?ref=snap
U3 = DeskAssistant v19 v1; AVAILABILITY: In Stock; CHECK_PRICES: https://www.snapeda.com/parts/DS3231SN%23/Analog+Devices/view-part/?ref=eda; DESCRIPTION: Extremely Accurate I²C-Integrated RTC/TCXO/Crystal; MF: Analog Devices; MP: DS3231SN#; PACKAGE: SOIC-16 Maxim; PRICE: None; PURCHASE-URL: https://www.snapeda.com/api/url_track_click_mouser/?unipart_id=99048&manufacturer=Analog Devices&part_name=DS3231SN#&search_term=None; SNAPEDA_LINK: https://www.snapeda.com/parts/DS3231SN%23/Analog+Devices/view-part/?ref=snap
U4 = DeskAssistant v19 v1; AVAILABILITY: In Stock; CHECK_PRICES: https://www.snapeda.com/parts/MAX17048G+T10/Analog+Devices/view-part/?ref=eda; DESCRIPTION: 3µA 1-Cell/2-Cell Fuel Gauge with ModelGauge; MF: Analog Devices; MP: MAX17048G+T10; PACKAGE: TDFN-8 Maxim; PRICE: None; PURCHASE-URL: https://www.snapeda.com/api/url_track_click_mouser/?unipart_id=329239&manufacturer=Analog Devices&part_name=MAX17048G+T10&search_term=None; SNAPEDA_LINK: https://www.snapeda.com/parts/MAX17048G+T10/Analog+Devices/view-part/?ref=snap

## Nets
3V3 [POWER]: C1_BAT2.1 C3.+ C9.1 D7.2 IC1.2 IC4.5 J3.2 J4.P4 Q2.3 R1.1 R1_PINH1.2 R2-PINH1.2 R5.2 R6.2 R7.2 R8.2 R9.2 R10.2 R_BOOT.1 R_CHANGE.1 R_CL1.1 R_RESET.1 TP16.TP U1.3 U1.7 U1.8 U2.2 U3.2
32KHZ: R2-PINH1.1 U2.9 U3.1
DN: D1.4 J2.A7 J2.B7
DP: D1.6 J2.A6 J2.B6
EPD_3V3 [POWER]: C7.1 EPD_C5.1 J1.15 J1.16 L1.2 Q2.2 TP17.TP
EPD_3V3_C [POWER]: Q2.1 R_CL1.2 TP13.TP U2.18
EPD_BUSY: J1.9 TP9.TP U2.26
EPD_CS: D6.1 J1.12 R9.1 TP10.TP U2.11
EPD_DC: J1.11 TP11.TP U2.5
EPD_RST: J1.10 TP12.TP U2.21
FLASH_CS: D9.1 R5.1 U1.1 U2.12
GDR: J1.2 Q3.1 R4.1
GND: BOOT_BUTTON.1 BOOT_BUTTON.2 C1.2 C1_BAT1.2 C1_BAT2.2 C1_BAT.2 C2.2 C2_BAT.2 C3.- C4_USB.2 C5.2 C5_USB.2 C6.2 C7.2 C8.2 C9.2 C10.2 C10_SUPERCAP.1 C_DELAY.2 CHANGE_BUTTON.1 CHANGE_BUTTON.2 D1.2 D3.1 D6.2 D8.2 D9.2 D10.2 D11.2 D12.2 EPD_C1.2 EPD_C2.2 EPD_C5.2 EPD_C6.2 EPD_C7.2 EPD_C8.2 EPD_C9.2 EPD_C10.2 EPD_C11.2 EPD_C12.2 IC1.3 IC4.2 J1.8 J1.17 J1.MP1 J1.MP2 J2.A1 J2.A12 J2.B1 J2.B12 J2.MP1 J2.MP2 J2.MP3 J2.MP4 J3.1 J4.G1 J4.G2 J4.G3 J4.G4 J4.P6 MCP73831.2 R1_PWRUSB.1 R2-USB1.1 R2-USB.2 R2.1 R2_BAT.1 R4.2 RESET_BUTTON.1 RESET_BUTTON.2 SENSOR2.1 SENSOR2.5 SENSOR2.7 SJ1.1 TP4.TP TP5.TP U1.4 U1.9 U2.1 U2.28 U2.29_1 U2.29_2 U2.29_3 U2.29_4 U2.29_5 U2.29_6 U2.29_7 U2.29_8 U2.29_9 U3.13 U4.1 U4.4 U4.6 U4.9
GPIO8: R1.2 U2.10
I2C_PW: C1.1 C2.1 R1_PINH.2 R2-PINH.2 SENSOR2.2 SENSOR2.6 SENSOR2.8 U2.17
INT_RTC: R1_PINH1.1 TP15.TP U2.8 U3.3
IO/BOOT: BOOT_BUTTON.3 BOOT_BUTTON.4 C6.1 R_BOOT.2 U2.15
IO/CHANGE: C10.1 CHANGE_BUTTON.3 CHANGE_BUTTON.4 R_CHANGE.2 U2.23
MISO: D12.1 J4.P7 R8.1 TP6.TP U1.2 U2.27
MOSI: D11.1 J1.14 J4.P3 R7.1 TP7.TP U1.5 U2.7
N$1: D7.1 R_CAPACITOR.1
N$2: EPD_C1.1 J1.4
N$3: EPD_C2.1 J1.5
N$4: EPD_C6.1 J1.18
N$5: EPD_C7.1 J1.19
N$6: EPD_C8.1 J1.20
N$7: C_DELAY.1 IC1.5
N$8: EPD_C10.1 J1.22
N$9: C4.1 D3.2 D4.1
N$10: EPD_C12.1 J1.24
N$11: MCP73831.1 R1_BAT.1
N$12: CHG_LED.C R1_BAT.2
N$13: MCP73831.5 R2_BAT.2
N$14: J2.A5 R2-USB1.2
N$15: J2.B5 R2-USB.1
N$16: C1_BAT1.1 D2.1 IC4.1 IC4.3 Q1.2
PREVGH: D5.1 EPD_C9.1 J1.21
PREVGL: D4.2 EPD_C11.1 J1.23
RESE: J1.3 Q3.2 R3.1
RESE': R2.2 R3.2 SJ1.2
RESET: C5.1 IC1.1 R_RESET.2 RESET_BUTTON.3 RESET_BUTTON.4 U2.3
RTC_RST: U2.16 U3.4
RX: TP2.TP U2.24
SCK: D10.1 J1.13 J4.P5 R6.1 TP8.TP U1.6 U2.6
SCL: J3.4 R2-PINH.1 SENSOR2.4 U2.20 U3.16 U4.7
SDA: J3.3 R1_PINH.1 SENSOR2.3 U2.19 U3.15 U4.8
SRC: C4.2 D5.2 L1.1 Q3.3
SS_SD: D8.1 J4.P2 R10.1 U2.4
TX: TP1.TP U2.25
USB_D+: D1.1 U2.14
USB_D-: D1.3 U2.13
VBAT [POWER]: C2_BAT.1 MCP73831.3 Q1.3 TP3.TP U4.2 U4.3
VBUS [POWER]: C1_BAT.1 C4_USB.1 C5_USB.1 CHG_LED.A D1.5 D2.2 MCP73831.4 PFMF.050.1.2 Q1.1 R1_PWRUSB.2 TP14.TP
VRTC [POWER]: C8.1 C10_SUPERCAP.2 R_CAPACITOR.2 U3.14
VUSB [POWER]: J2.A4 J2.A9 J2.B4 J2.B9 PFMF.050.1.1

## Tracks (layer width: path | path; a pad name or v marks a point on that pad's centre or on a via)
3V3  (via drill 0.35)
  Top 0.152: 47.24,100.43 46.94,100.43 IC1.2 46.79,100.28 | 54.1,107.29 54.56,107.29 R_BOOT.1 54.71,107.29 | 59.59,107.29 R_CHANGE.1 59.74,107.29 | 7.62,98.45 C9.1 7.62,98.3 | R_RESET.1 | 11.43,99.67 R10.2 | v7.01,90.37 5.64,90.37 J4.P4 | 7.01,97.69 v7.01,97.38 | 121.46,36.27 120.7,37.03 C3.+ 120.55,37.03 120.09,36.58 | 126.95,36.27 C1_BAT2.1 127.1,36.12 | 115.82,36.58 IC4.5 115.67,36.42 | 164.44,18.9 J3.2 | 8.84,45.41 8.84,45.72 U2.2 | 19.05,41.3 R1.1 | 55.93,36.27 R6.2 55.78,36.12 | 60.96,36.27 R7.2 60.96,36.12 | 65.99,33.68 R8.2 66.14,33.68 | 69.8,32.46 R_CL1.1 | 74.68,32.92 Q2.3 | 92.81,52.73 R2-PINH1.2 92.81,52.58 | 93.88,60.2 R1_PINH1.2 93.88,60.35 | 87.02,59.74 87.02,59.28 U3.2 87.02,59.13 | 88.7,65.99 D7.2 88.54,66.14 | 93.27,50.75 93.42,50.9 | U1.7 50.9,56.84 50.9,57.91 U1.8 | 40.69,47.7 R9.2 40.54,47.55 | 42.98,55.32 U1.3 43.13,55.47 43.43,55.47 | 50.75,36.27 R5.2 50.9,36.12 | 50.75,58.06 U1.8 | 50.9,58.06 U1.8
  Top 0.305: 54.1,107.29 47.24,100.43 | 54.71,107.29 59.59,107.29 | 7.62,98.45 10.21,98.45 11.43,99.67 R_RESET.1 | 7.62,98.3 7.01,97.69 | v45.57,100.28 46.79,100.28 | 121.46,36.27 126.95,36.27 | 120.09,36.58 115.82,36.58 | v156.21,18.9 164.44,18.9 | 127.1,36.12 v138.99,36.12 | v16.61,41.3 19.05,41.3 | 10.67,43.59 v14.33,43.59 | 60.96,36.27 55.93,36.27 | 65.99,33.68 63.4,33.68 60.96,36.12 | v68.28,32.46 69.8,32.46 | 66.14,33.68 v67.06,33.68 | v73.76,32.92 74.68,32.92 | 92.81,52.73 92.81,59.13 93.88,60.2 | 88.7,65.99 88.7,64.31 89,64.01 89,61.72 87.02,59.74 | 87.02,59.13 87.02,55.91 92.19,50.75 93.27,50.75 | 41.91,47.7 40.69,47.7 | 41.91,47.7 42.22,48.01 42.22,54.56 42.98,55.32 | 50.75,36.27 50.75,38.1 41.91,46.94 41.91,47.7 | 43.43,55.47 44.2,56.24 44.2,57.61 45.11,58.52 48.8,58.52 49.26,58.06 50.75,58.06 | 88.54,66.14 87.78,66.14 87.16,66.77 61.28,66.77 52.58,58.06 50.9,58.06 | 55.78,36.12 55.17,36.12 v54.86,35.81 | v51.82,35.81 51.21,35.81 50.9,36.12 | v23.77,48.46 30.33,48.46 31.7,47.09 40.08,47.09 40.54,47.55 | 115.67,36.42 115.06,36.42 v114.61,35.97 | 59.74,107.29 59.74,96.62 93.88,62.48 93.88,60.35 | 93.42,50.9 93.44,50.92 93.44,51.95 92.81,52.58 | 10.67,43.59 9.42,44.83 9.41,44.83 8.84,45.41 | 10.67,43.59 10.67,30.45 0.35,20.13 0.35,6.74 TP16.TP
  Bottom 0.305: v7.01,90.37 v7.01,97.38 9.91,100.28 v45.57,100.28 | v138.99,36.12 v156.21,18.9 | v14.33,43.59 v16.61,41.3 v23.77,48.46 | v67.06,33.68 v68.28,32.46 68.73,32.92 v73.76,32.92 78.03,37.19 89.61,37.19 90.83,35.97 v114.61,35.97 | v51.82,35.81 v54.86,35.81
32KHZ
  Top 0.152: R2-PINH1.1 92.66,51.51 88.39,55.78 88.39,59.13 U3.1 88.39,59.28 89.36,60.25 89.36,66.5 88.73,67.12 61.14,67.12 55.73,61.72 38.1,61.72 31.39,55.02 26.36,55.02 17.68,46.33 17.68,45.87 U2.9
DN
  Top 0.152: 162.81,54.15 163.22,54.56 J2.A7 | D1.4 151.03,48.62 150.72,48.62 150.27,49.07 150.27,50.9 150.35,50.98 153.02,50.98 153.14,50.87 155.86,50.87 157.03,52.03 158.61,52.03 160.65,54.08 162.81,54.15 | J2.B7 163.69,53.7 163.18,53.7 163.06,53.82 163.06,53.91 162.81,54.15
DP  (via drill 0.35)
  Top 0.152: 164.74,54.25 164.59,54.1 163.98,54.1 J2.A6 | 164.74,54.25 164.74,54.71 164.44,55.02 163.98,55.02 J2.B6 | D1.6 151.22,50.59 155.97,50.59 157.14,51.76 159.72,51.76 v159.97,52.01 | v162.51,55.22 162.83,54.9 164.5,54.9 164.62,54.78 164.62,54.38 164.74,54.25
  Bottom 0.152: v162.51,55.22 160.53,53.24 160.87,52.91 v159.97,52.01
EPD_3V3  (via drill 0.35)
  Top 0.152: 78.18,33.07 C7.1 78.03,32.92 | 81.08,15.54 J1.15 | 72.54,32 Q2.2 72.69,32.16 | 80.77,15.54 J1.16 | 72.39,24.84 EPD_C5.1 | 8.99,5.18 TP17.TP
  Top 0.305: 78.18,33.07 78.18,33.98 L1.2 | 81.08,15.54 80.77,15.54 v80.77,16.46 | 72.54,32 71.63,31.09 71.63,25.6 72.39,24.84 v77.27,19.96 | 8.99,5.18 36.83,5.18 57.1,25.45 v62.18,25.45 | 78.03,32.92 77.17,32.92 76.4,32.16 72.69,32.16
  Bottom 0.305: v80.77,16.46 v77.27,19.96 65.94,19.96 62.18,23.72 v62.18,25.45
EPD_3V3_C  (via drill 0.35)
  Top 0.152: 72.39,33.68 72.54,33.83 Q2.1 | 69.95,33.68 R_CL1.2 69.8,33.53 | 20.27,63.25 U2.18 | 2.59,11.43 TP13.TP | 7.01,17.68 7.16,17.68
  Top 0.305: 72.39,33.68 69.95,33.68 | v20.27,52.88 20.27,63.25 | 2.59,11.43 2.59,13.26 7.01,17.68 7.61,18.28 7.61,18.31 8.36,19.06 8.39,19.06 v10.21,20.88 | 69.8,33.53 67.82,33.53 67.36,33.07 67.33,33.04 38.68,33.04 15.79,10.15 14.71,10.15 13.96,10.9 13.96,10.99 13.09,11.86 12.98,11.86 7.16,17.68
  Bottom 0.305: v20.27,52.88 24.38,48.77 24.38,48.16 10.21,33.98 v10.21,20.88
EPD_BUSY  (via drill 0.35)
  Top 0.152: v83.67,16.46 84.12,16 84.12,15.54 J1.9 | v60.96,22.25 v65.84,22.25 | v17.07,22.25 15.24,24.08 TP9.TP 15.24,24.23 13.87,25.6 13.87,39.47 16.15,41.76 v16.15,42.67 | v10.67,56.54 10.67,61.72 10.06,62.33 10.06,63.25 U2.26
  Bottom 0.152: v83.67,16.46 82.91,16.46 82.6,16.15 81.99,16.15 77.57,20.57 67.51,20.57 v65.84,22.25 | v17.07,22.25 v60.96,22.25 | v10.67,56.54 10.67,52.12 16.15,46.63 v16.15,42.67
EPD_CS  (via drill 0.35)
  Top 0.152: v82.3,16.76 82.6,16.46 82.6,15.54 J1.12 | v45.41,45.26 44.5,46.18 D6.1 | v20.12,42.98 20.12,45.72 U2.11 20.27,45.87 20.27,46.33 21.79,47.85 25.76,47.85 27.13,46.48 40.54,46.48 R9.1 40.69,46.33 41.76,45.26 v42.37,45.26 | TP10.TP 2.59,17.83 2.59,21.87 11.02,30.3 11.02,30.38 v12.65,32
  Bottom 0.152: v82.3,16.76 81.84,16.76 77.72,20.88 70.41,20.88 55.47,35.81 55.47,36.12 46.33,45.26 v45.41,45.26 v42.37,45.26 | v12.65,32 12.65,35.51 v20.12,42.98
EPD_DC  (via drill 0.35)
  Top 0.152: v78.79,12.95 82.6,12.95 83.21,13.56 83.21,15.39 J1.11 | v72.39,12.95 v74.68,12.95 | TP11.TP v10.06,16.61 | v12.5,44.2 12.5,45.72 U2.5
  Bottom 0.152: v74.68,12.95 v78.79,12.95 | v72.39,12.95 13.72,12.95 v10.06,16.61 8.99,17.68 8.99,33.68 12.5,37.19 v12.5,44.2
EPD_RST  (via drill 0.35)
  Top 0.152: J1.10 83.67,13.56 82.45,12.34 78.49,12.34 72.39,18.44 v72.39,23.77 | v62.48,33.68 62.18,33.68 61.92,33.43 30.84,33.43 17.37,19.96 | 17.37,19.96 15.24,17.83 TP12.TP | v16.76,49.53 16.76,54.71 16.46,55.02 16.46,63.25 U2.21 | v16.76,43.74 16.31,43.74 13.56,41 13.56,23.77 17.37,19.96
  Bottom 0.152: v62.48,33.68 v72.39,23.77 | v16.76,43.74 v16.76,49.53
FLASH_CS  (via drill 0.35)
  Top 0.152: v41.6,49.38 41.6,55.02 42.52,55.93 43.25,55.93 43.77,56.45 43.77,57.27 43.09,57.95 U1.1 | U2.12 21.49,45.72 21.49,45.41 31.85,35.05 50.75,35.05 R5.1 50.9,35.05 51.97,35.05 52.43,35.51 52.43,38.25 50.9,39.78 D9.1 50.76,39.93 49.42,39.93 42.82,46.53 v42.82,48.16
  Bottom 0.152: v42.82,48.16 v41.6,49.38
GDR
  Top 0.152: J1.2 87.78,15.54 87.78,19.96 92.2,24.38 92.2,28.96 86.72,34.44 86.72,36.12 85.19,37.64 77.27,37.64 73.46,33.83 73.46,33.53 72.69,32.77 71.63,32.77 62.03,23.16 59.13,23.16 54.1,18.14 Q3.1 53.95,17.98 53.95,12.8 R4.1
GND  (via drill 0.35)
  Top 0.127: J2.B1 163.84,57.48 163.84,57.62 J2.A12 163.84,57.76 163.84,58.72 164.4,59.28 J2.MP4 | J2.B12 163.84,50.97 J2.A1 163.84,50.83 163.84,49.03 J2.MP3
  Top 0.152: TP5.TP 7.62,30.48 | 7.62,30.48 TP4.TP | U2.29_3 12.04,54.41 13.11,54.41 U2.29_6 13.26,54.41 14.33,54.41 U2.29_9 | U2.29_1 11.89,51.97 11.89,53.03 U2.29_2 12.04,53.19 13.11,53.19 U2.29_5 | U2.29_1 12.04,51.97 13.11,51.97 U2.29_4 13.26,51.97 14.33,51.97 U2.29_7 14.48,51.97 14.48,53.03 U2.29_8 14.48,53.19 14.48,54.25 U2.29_9 | 8.08,48.01 10.06,49.99 10.06,50.44 11.43,51.82 11.89,51.82 U2.29_1 | 8.08,48.01 7.47,47.4 7.47,45.87 U2.1 7.32,45.72 8.69,44.35 8.69,42.06 7.62,41 7.62,30.48 | 8.08,48.01 7.47,48.62 7.47,63.25 U2.28 7.32,63.4 7.32,76.96 1.98,82.3 J4.G3 1.98,82.45 1.98,89.15 5.49,92.66 | C10.2 69.8,108.51 66.14,108.51 65.84,108.2 CHANGE_BUTTON.2 65.68,108.2 62.33,108.2 CHANGE_BUTTON.1 62.18,108.05 60.35,108.05 60.2,107.9 58.98,107.9 58.83,107.75 55.32,107.75 55.17,107.9 51.05,107.9 50.9,108.05 BOOT_BUTTON.2 50.75,108.2 | 47.4,108.2 BOOT_BUTTON.1 | C_DELAY.2 51.97,101.04 51.23,101.78 49.13,101.78 48.92,101.58 48.92,101.19 47.24,99.52 46.94,99.52 IC1.3 46.79,99.52 45.41,99.52 44.96,99.97 44.96,101.35 47.24,103.63 | BOOT_BUTTON.1 47.24,108.05 47.24,107.9 BOOT_BUTTON.1 | 26.06,108.51 25.76,108.2 RESET_BUTTON.2 25.6,108.2 | 29.11,108.51 C5.2 29.26,108.66 | 44.35,108.66 C6.2 | 22.25,108.2 RESET_BUTTON.1 22.1,108.05 | 15.24,92.2 15.24,92.05 16.15,91.14 J4.G2 16.31,90.98 17.07,90.22 17.07,87.17 16.31,86.41 16.31,85.34 J4.G1 | 15.24,92.2 15.24,94.79 15.85,95.4 15.85,99.06 D8.2 16,99.06 | C9.2 7.62,99.67 7.16,99.67 3.05,95.56 J4.G4 3.05,95.4 3.05,94.94 4.88,93.12 5.03,93.12 5.49,92.66 | 5.49,92.66 J4.P6 5.64,92.51 5.94,92.2 15.24,92.2 | 135.79,53.03 135.33,52.58 135.03,52.58 U4.4
  Top 0.152: 135.79,53.34 135.79,53.03 | 135.79,53.34 135.79,53.65 135.33,54.1 135.03,54.1 U4.1 134.87,54.1 130.91,54.1 C1_BAT.2 130.76,53.95 128.93,52.12 128.93,50.14 127.86,49.07 | 135.79,53.34 U4.9 135.79,53.03 | 135.79,53.03 136.85,53.03 U4.6 137.01,53.03 140.66,53.03 144.78,48.92 | 127.86,49.07 127.86,43.43 127.1,42.67 R2_BAT.1 | 127.86,49.07 127.41,49.53 MCP73831.2 | C2.2 154.99,7.01 154.99,7.62 155.75,8.38 155.75,8.69 SENSOR2.7 155.75,8.84 155.75,9.14 155.14,9.75 155.14,11.58 SENSOR2.1 155.14,11.73 155.14,12.04 155.6,12.5 | C1.2 158.65,7.01 158.65,7.62 157.58,8.69 SENSOR2.5 157.58,8.84 159.56,10.82 | 159.56,10.82 164.44,15.7 164.44,17.68 J3.1 | 155.6,12.5 157.89,12.5 159.56,10.82 | J2.MP4 164.44,59.44 168.25,59.44 J2.MP2 168.4,59.28 168.4,49.23 J2.MP1 168.25,49.23 164.44,49.23 J2.MP3 163.94,48.72 153.41,48.72 151.64,46.94 | 144.78,48.92 147.68,48.92 148.28,49.53 D1.2 148.9,49.53 | 148.9,49.53 149.5,50.14 149.5,50.6 151.49,52.58 153.62,52.58 R2-USB.2 | 151.64,46.94 151.64,45.72 C5_USB.2 151.79,43.28 C4_USB.2 151.79,43.13 155.6,39.32 155.6,30.48 | 151.64,46.94 150.57,48.01 150.42,48.01 148.9,49.53 | 155.6,30.48 155.6,12.5 | 144.78,48.92 R2-USB1.1 | J1.MP1 89.31,12.95 89.31,19.96 95.25,25.91 EPD_C11.2 99.52,26.06 EPD_C12.2 99.67,26.06 103.94,26.06 108.51,30.63 | 108.51,35.05 105.46,35.05 R1_PWRUSB.1 105.31,35.05 100.13,35.05 90.98,44.2 v82.75,44.2 81.84,43.28 D3.1 81.69,43.28 80.16,43.28 79.55,43.89 63.4,43.89 60.96,41.45 | 108.51,35.05 108.97,35.51 112.17,35.51 | 112.17,35.51 112.78,35.51 IC4.2 | 108.51,30.63 110.64,28.5 111.71,28.5 112.32,29.11 C1_BAT1.2 112.47,29.26 117.2,33.98 120.55,33.98 C3.- 120.7,34.14 121.46,34.9 126.95,34.9 C1_BAT2.2 144.16,34.91 151.13,27.94 153.06,27.94 155.6,30.48
  Top 0.152: 108.51,35.05 108.51,30.63 | 112.17,35.51 112.17,36.88 112.32,37.03 112.32,46.94 C2_BAT.2 | 78.03,31.7 79.25,32.92 C7.2 | 78.03,31.7 EPD_C5.2 | 83.21,17.37 83.67,17.37 84.58,16.46 84.58,15.54 J1.8 84.58,15.39 84.58,14.02 82.6,12.04 78.03,12.04 69.19,20.88 68.58,20.88 | 83.21,17.37 80.77,17.37 80.16,16.76 80.16,15.54 J1.17 | EPD_C6.2 EPD_C7.2 80.01,25.91 81.53,25.91 83.21,24.23 | 86.87,26.06 EPD_C9.2 | 86.87,26.06 84.58,26.06 | 84.58,26.06 EPD_C8.2 83.82,25.91 78.03,31.7 | 86.87,26.06 86.87,24.38 87.17,24.08 88.09,24.08 89.92,25.91 91.44,25.91 EPD_C10.2 | 83.21,24.23 83.36,24.08 84.28,24.08 84.58,24.38 84.58,26.06 | 83.21,24.23 83.21,17.37 | 67.82,20.12 67.82,19.2 67.97,19.05 69.49,19.05 75.59,12.95 J1.MP2 | 68.58,20.88 67.82,20.12 | 64.77,20.88 67.06,20.88 67.82,20.12 | 53.95,7.62 53.95,7.32 54.71,6.55 56.08,6.55 56.39,6.86 58.37,6.86 R2.1 58.52,7.01 60.96,9.45 60.96,17.07 64.77,20.88 | 55.17,11.58 55.17,9.14 53.95,7.92 53.95,7.62 | 55.17,11.58 55.17,12.65 R4.2 | 53.95,7.62 SJ1.1 | 65.53,27.89 61.11,23.47 56.84,23.47 53.03,19.66 53.03,12.04 53.49,11.58 55.17,11.58 | 65.53,27.89 66.75,29.11 D12.2 | 64.77,20.88 EPD_C1.2 | 68.58,20.88 EPD_C2.2 | 44.35,54.25 45.11,54.25 46.94,56.08 U1.9 | 44.35,54.25 v44.2,54.25 43.13,54.25 U1.4 | 44.35,54.25 44.35,47.85 D6.2 44.5,47.7 50.75,41.45 D9.2 50.9,41.45 v52.73,41.45 | 85.65,47.09 84.58,48.16 84.58,49.84 U3.13 | 85.65,47.09 86.56,46.18 87.48,46.18 88.24,46.94 C8.2 88.39,47.09 95.71,47.09 98.75,50.14 98.75,51.82 97.84,52.73 97.84,53.03 C10_SUPERCAP.1 | 60.96,41.45 55.93,41.45 D10.2 55.78,41.45 55.47,41.76 v54.86,41.76 | 60.96,41.45 D11.2
  Top 0.152: v85.04,46.48 85.65,47.09 | v65.53,28.04 65.53,27.89 | v16.15,54.41 14.48,54.41 U2.29_9
  Top 0.305: 50.75,108.2 47.4,108.2 | 47.24,103.63 47.24,107.9 v45.87,107.9 | 26.06,108.51 29.11,108.51 | 29.26,108.66 43.43,108.66 | 43.43,108.66 44.35,108.66 | 25.6,108.2 22.25,108.2 | 22.1,108.05 22.1,105.16 16,99.06 | 43.43,108.66 v43.43,108.36
  Bottom 0.152: v82.75,44.2 v85.04,46.48 | 54.56,41.45 v52.73,41.45 | v54.86,41.76 54.56,41.45 | v65.53,28.04 54.56,39.01 54.56,41.45 | v16.15,54.41 28.04,54.41 30.48,56.84 38.71,56.84 41.3,54.25 v44.2,54.25
  Bottom 0.305: v45.87,107.9 43.89,107.9 v43.43,108.36
  pour Top: 71.16,110.36 71.14,110.34 18.06,110.34 18.04,110.36 18.02,110.38 18,110.4 18,111.12 0.08,111.12 0.08,0.08 73.94,0.1 73.94,9.99 73.94,9.99 73.94,10.01 73.94,10.03 73.94,10.03 73.94,10.03 73.95,10.04 73.96,10.05 73.96,10.05 73.96,10.05 73.97,10.06 73.98,10.07 73.98,10.07 73.98,10.07 73.99,10.08 74,10.09 74,10.09 74,10.09 74.02,10.09 74.04,10.09 74.04,10.09 92.19,10.07 92.2,10.07 92.21,10.07 92.21,10.07 92.22,10.06 92.23,10.05 92.23,10.05 92.23,10.05 92.24,10.04 92.25,10.03 92.25,10.03 92.25,10.03 92.26,10.02 92.27,10.01 92.27,10.01 92.27,10.01 92.27,9.99 92.3,0.11 170.12,0.08 170.13,67.15 92.19,67.14 92.19,67.14 92.17,67.16 92.16,67.17 92.15,67.18 92.13,67.2 92.12,111.12 71.2,111.12 71.2,110.4 71.18,110.38
  pour Bottom: 71.16,110.36 71.14,110.34 18.06,110.34 18.04,110.36 18.02,110.38 18,110.4 18,111.12 0.08,111.12 0.08,0.08 73.93,0.09 73.9,9.98 73.9,9.98 73.9,10 73.9,10.01 73.9,10.02 73.9,10.02 73.91,10.03 73.92,10.04 73.92,10.04 73.92,10.04 73.93,10.05 73.94,10.06 73.94,10.06 73.94,10.06 73.95,10.07 73.96,10.08 73.96,10.08 73.96,10.08 73.98,10.08 73.99,10.08 74,10.08 92.2,10.08 92.22,10.08 92.22,10.08 92.22,10.08 92.23,10.07 92.24,10.06 92.24,10.06 92.24,10.06 92.25,10.05 92.26,10.04 92.26,10.04 92.26,10.04 92.27,10.03 92.28,10.02 92.28,10.02 92.28,10.02 92.28,10 92.3,0.1 170.12,0.07 170.13,67.15 92.21,67.15 92.19,67.15 92.19,67.15 92.19,67.15 92.18,67.16 92.17,67.17 92.17,67.17 92.17,67.17 92.16,67.17 92.15,67.19 92.15,67.19 92.15,67.19 92.14,67.2 92.13,67.21 92.13,67.21 92.13,67.21 92.13,67.23 92.12,111.12 71.2,111.12 71.2,110.4 71.18,110.38
GPIO8
  Top 0.152: R1.2 19.05,45.57 18.9,45.72 U2.10
I2C_PW  (via drill 0.35)
  Top 0.152: 156.67,5.79 158.65,5.79 C1.1 | 156.67,5.79 154.99,5.79 C2.1 154.84,5.79 154.23,6.4 154.23,7.01 | 154.23,7.01 154.23,7.47 154.99,8.23 154.99,8.69 SENSOR2.8 | 156.67,5.79 156.67,8.69 SENSOR2.6 156.51,8.84 156.51,9.14 155.91,9.75 155.91,11.58 SENSOR2.2 | v31.09,55.63 28.8,55.63 21.49,62.94 21.49,63.25 U2.17 | v141.73,11.28 146,7.01 R2-PINH.2 146.15,7.01 149.81,7.01 R1_PINH.2 149.96,7.01 154.23,7.01
  Bottom 0.152: v141.73,11.28 75.44,11.28 67.11,19.61 65.79,19.61 61.82,23.58 61.82,24.89 v31.09,55.63
INT_RTC
  Top 0.152: 83.82,46.79 84.73,45.87 94.94,45.87 99.06,49.99 99.06,53.65 94.03,58.67 94.03,58.98 R1_PINH1.1 | 83.82,46.79 83.82,57 85.65,58.83 85.65,59.13 U3.3 | 16.31,44.35 16.31,44.2 13.26,41.15 13.26,13.41 TP15.TP | 16.31,44.35 16.31,45.72 U2.8 | 83.82,46.79 57.76,46.79 53.34,42.37 53.34,35.97 51.71,34.34 30.63,34.34 23.06,41.91 18.44,41.91 17.37,42.98 17.37,44.04 17.07,44.35 16.31,44.35
IO/BOOT
  Top 0.127: 47.37,108.97 47.37,109.55 BOOT_BUTTON.4 | 50.69,108.97 50.69,109.55 BOOT_BUTTON.3
  Top 0.152: R_BOOT.2 54.56,108.66 54.25,108.97 50.69,108.97 47.37,108.97 46.02,108.97 44.5,107.44 C6.1 44.5,107.29 44.5,99.97 44.96,99.52 44.96,93.88 24.08,73 24.08,63.4 U2.15
IO/CHANGE  (via drill 0.35)
  Top 0.127: 62.33,109.27 62.33,109.55 CHANGE_BUTTON.4 | 65.79,109.27 65.79,109.55 CHANGE_BUTTON.3
  Top 0.152: C10.1 69.95,107.44 70.56,108.05 70.56,109.12 70.41,109.27 65.79,109.27 62.33,109.27 61.72,109.27 61.11,108.66 59.74,108.66 R_CHANGE.2 59.59,108.51 59.44,108.36 v58.52,108.36 | v44.35,94.18 13.87,63.7 13.87,63.4 U2.23
  Bottom 0.152: v58.52,108.36 v44.35,94.18
MISO  (via drill 0.35)
  Top 0.152: D12.1 65.38,29.26 65.99,29.87 65.99,32.31 R8.1 65.99,32.46 v53.34,32.46 | v10.06,61.42 10.06,61.72 8.84,62.94 8.84,63.25 U2.27 | U1.2 42.98,56.84 35.36,56.84 v34.75,57.45 v31.55,54.25 | v8.08,92.81 7.32,93.57 5.94,93.57 J4.P7 | v15.24,35.2 TP6.TP
  Bottom 0.152: v34.75,57.45 14.02,57.45 v10.06,61.42 10.06,86.72 8.08,88.7 v8.08,92.81 | v15.24,35.2 15.24,37.19 24.84,46.79 24.84,47.55 v31.55,54.25 v53.34,32.46
MOSI  (via drill 0.35)
  Top 0.152: v81.69,14.48 81.69,15.39 J1.14 | v87.63,36.27 85.5,38.41 62.33,38.41 60.96,39.78 | 57.45,39.78 53.95,36.27 53.95,35.42 55.01,34.36 56.45,34.36 57,34.9 R7.1 | 60.96,39.78 57.45,39.78 | 60.96,39.78 D11.1 | v50.9,47.09 50.9,54.1 U1.5 | 57.45,39.78 v57.45,40.54 | v16.15,47.85 15.09,46.79 15.09,45.87 U2.7 14.94,45.72 14.94,43.28 11.89,40.23 v11.89,38.1 | v8.23,87.63 6.71,89.15 5.94,89.15 J4.P3 | v2.59,28.8 2.59,24.23 TP7.TP
  Bottom 0.152: v81.69,14.48 83.06,14.48 91.29,22.71 91.29,32.61 v87.63,36.27 | v57.45,40.54 v50.9,47.09 41.91,47.09 32.46,56.54 30.63,56.54 28.19,54.1 20.42,54.1 17.98,51.66 | v16.15,47.85 16.15,49.84 17.98,51.66 | v8.23,87.63 8.23,78.18 9.75,76.66 9.75,62.03 9.45,61.72 9.45,61.11 15.54,55.02 15.54,54.1 17.98,51.66 | v11.89,38.1 v2.59,28.8
N$1
  Top 0.152: D7.1 86.72,65.99 86.72,65.08 88.24,63.55 R_CAPACITOR.1
N$2
  Top 0.152: J1.4 86.56,15.39 86.56,14.94 83.06,11.43 73,11.43 EPD_C1.1
N$3
  Top 0.152: J1.5 86.11,15.39 86.11,14.94 82.91,11.73 77.88,11.73 69.95,19.66 EPD_C2.1
N$4
  Top 0.152: J1.18 79.7,15.54 79.7,23.32 80.77,24.38 80.77,25.15 80.47,25.45 76.81,25.45 76.2,24.84 EPD_C6.1
N$5
  Top 0.152: J1.19 79.25,15.54 79.25,23.93 80.01,24.69 EPD_C7.1
N$6
  Top 0.152: J1.20 78.64,15.54 78.64,21.18 75.44,24.38 75.44,26.52 75.59,26.67 81.99,26.67 83.82,24.84 EPD_C8.1
N$7
  Top 0.152: C_DELAY.1 51.97,99.82 51.05,99.82 49.68,101.19 IC1.5
N$8  (via drill 0.35)
  Top 0.152: v80.77,14.48 78.18,14.48 77.72,14.94 77.72,15.39 J1.22 | v90.68,23.93 91.44,24.69 EPD_C10.1
  Bottom 0.152: v80.77,14.48 82.14,15.85 83.97,15.85 90.68,22.55 v90.68,23.93
N$9
  Top 0.152: C4.1 93.88,38.86 89.92,38.86 89.46,39.32 D4.1 89.31,39.47 87.63,41.15 81.84,41.15 79.86,43.13 78.33,43.13 D3.2
N$10  (via drill 0.35)
  Top 0.152: v77.27,16.46 76.66,15.85 76.66,15.54 J1.24 | v98.75,23.93 99.52,24.69 EPD_C12.1
  Bottom 0.152: v77.27,16.46 77.88,16.46 81.38,12.95 87.78,12.95 v98.75,23.93
N$11
  Top 0.152: R1_BAT.1 118.87,45.72 119.63,44.96 120.4,44.96 123.6,48.16 123.6,49.07 123.75,49.23 126.03,49.23 126.64,48.62 126.95,48.62 MCP73831.1
N$12
  Top 0.152: CHG_LED.C 119.94,50.75 119.94,45.72 R1_BAT.2
N$13
  Top 0.152: R2_BAT.2 126.95,43.89 126.95,46.02 124.51,48.46 MCP73831.5
N$14  (via drill 0.35)
  Top 0.152: v147.37,50.29 144.78,50.29 R2-USB1.2 | J2.A5 163.83,53.03 162.91,53.03 v162.34,52.46
  Bottom 0.152: v147.37,50.29 157.94,50.29 158.94,51.3 159.91,51.3 161.07,52.46 v162.34,52.46
N$15
  Top 0.152: R2-USB.1 153.77,51.51 156.11,51.51 160.58,55.98 163.77,55.98 J2.B5
N$16
  Top 0.152: 111.1,34.59 112.78,34.59 IC4.3 112.93,34.75 113.23,34.75 113.69,35.2 113.69,35.97 | 111.1,34.59 109.27,34.59 D2.1 | 111.1,34.59 111.1,29.26 C1_BAT1.1 | 113.69,35.97 113.23,36.42 112.93,36.42 IC4.1 | 113.69,35.97 116.13,38.41 129.24,38.41 134.26,43.43 Q1.2
PREVGH  (via drill 0.35)
  Top 0.152: v76.81,22.1 78.18,20.73 78.18,15.54 J1.21 | 88.39,25.6 87.63,24.84 EPD_C9.1 | 88.39,25.6 88.39,26.52 85.95,28.96 85.95,35.51 D5.1 | 88.39,25.6 v88.7,25.6
  Bottom 0.152: v76.81,22.1 85.19,22.1 v88.7,25.6
PREVGL  (via drill 0.35)
  Top 0.152: v81.69,13.56 78.64,13.56 77.27,14.94 77.27,15.39 J1.23 | v94.49,23.93 95.25,24.69 EPD_C11.1 | v89.31,36.58 86.56,39.32 85.95,39.32 D4.2
  Bottom 0.152: v81.69,13.56 81.99,13.56 82.3,13.26 83.82,13.26 v94.49,23.93 94.49,29.87 89.31,35.05 v89.31,36.58
RESE  (via drill 0.35)
  Top 0.152: v83.82,19.2 87.17,15.85 87.17,15.54 J1.3 | v71.63,21.49 70.26,22.86 60.66,22.86 59.13,21.34 59.13,18.14 | 59.13,18.14 59.13,16.61 R3.1 | 59.13,18.14 55.32,18.14 Q3.2
  Bottom 0.152: v83.82,19.2 79.86,19.2 77.57,21.49 v71.63,21.49
RESE'
  Top 0.152: SJ1.2 55.47,7.62 56.08,8.23 58.37,8.23 R2.2 58.52,8.38 60.2,10.06 60.2,16.46 R3.2
RESET  (via drill 0.35)
  Top 0.127: v20.12,107.44 19.94,107.61 21.88,109.55 22.16,109.55 RESET_BUTTON.4 22.3,109.69 25.62,109.69 RESET_BUTTON.3
  Top 0.152: v20.12,107.44 19.05,108.51 R_RESET.2 | C5.1 29.11,107.44 v28.19,107.44 30.73,104.9 30.73,97.94 v9.14,76.35 | v45.87,101.35 46.79,101.35 IC1.1 | v10.67,50.14 10.06,49.53 10.06,45.87 U2.3
  Bottom 0.152: v20.12,107.44 v28.19,107.44 34.29,101.35 v45.87,101.35 | v10.67,50.14 10.67,51.66 9.91,52.43 9.91,60.2 9.14,60.96 v9.14,76.35
RTC_RST  (via drill 0.35)
  Top 0.152: v55.47,62.33 23.32,62.33 22.71,62.94 22.71,63.25 U2.16 | v81.84,62.33 84.43,59.74 84.43,59.28 U3.4
  Bottom 0.152: v81.84,62.33 v55.47,62.33
RX  (via drill 0.35)
  Top 0.152: v9.3,53.34 12.5,56.54 12.5,63.25 U2.24 | v8.08,49.84 v8.08,52.12 | v8.69,38.41 8.69,37.03 TP2.TP
  Bottom 0.152: v8.08,52.12 v9.3,53.34 | v8.08,49.84 8.69,49.23 v8.69,38.41
SCK  (via drill 0.35)
  Top 0.152: v13.72,44.35 13.72,45.72 U2.6 13.87,45.87 13.87,46.48 16.31,48.92 19.36,48.92 v23.93,53.49 | v9.6,25.6 9.6,24.84 TP8.TP | v7.92,76.05 8.84,76.96 8.84,89.46 6.86,91.44 5.94,91.44 J4.P5 | v53.03,42.98 53.03,53.19 50.9,55.32 U1.6 | v53.95,42.06 53.95,41.76 55.78,39.93 D10.1 | v82.6,13.87 82.6,14.48 82.14,14.94 82.14,15.39 J1.13 | v91.9,30.18 87.02,35.05 87.02,36.27 85.34,37.95 v56.54,37.95 56.08,37.95 54.25,36.12 54.25,35.51 54.71,35.05 55.78,35.05 R6.1
  Bottom 0.152: v7.92,76.05 7.92,52.88 7.47,52.43 7.47,51.82 11.12,48.16 11.43,48.16 13.72,45.87 v13.72,44.35 13.72,37.99 9.6,33.88 v9.6,25.6 | v82.6,13.87 82.91,13.87 91.9,22.86 v91.9,30.18 | v56.54,37.95 56.54,41 55.17,42.37 54.56,42.37 54.25,42.06 v53.95,42.06 v53.03,42.98 50.14,45.87 42.67,45.87 32.31,56.24 30.79,56.24 28.04,53.49 v23.93,53.49
SCL  (via drill 0.35)
  Top 0.152: v137.92,53.65 137.01,53.65 U4.7 | v164.44,27.13 164.44,20.88 J3.4 164.59,20.73 164.9,20.73 165.81,19.81 165.81,11.12 159.41,4.72 149.66,4.72 148.74,5.64 146.15,5.64 R2-PINH.1 | v158.19,11.28 157.89,11.58 157.43,11.58 SENSOR2.4 | v18.29,62.03 17.68,62.64 17.68,63.25 U2.20 | U3.16 88.24,49.99 88.24,50.44 87.4,51.28 v87.4,51.51
  Bottom 0.152: v158.19,11.28 158.19,20.88 v164.44,27.13 v137.92,53.65 137.62,53.65 136.09,55.17 90.83,55.17 87.17,51.51 | v18.29,62.03 34.44,62.03 41.3,55.17 83.52,55.17 87.17,51.51 | v87.4,51.51 87.17,51.51
SDA  (via drill 0.35)
  Top 0.152: v138.84,53.65 138.23,54.25 137.62,54.25 137.47,54.1 137.01,54.1 U4.8 136.85,54.1 136.4,54.56 v135.79,54.56 | v163.53,28.96 163.53,20.42 164.13,19.81 164.44,19.81 J3.3 164.59,19.66 165.05,19.66 165.51,19.2 165.51,11.28 159.26,5.03 154.38,5.03 153.77,5.64 149.96,5.64 R1_PINH.1 | v157.43,10.52 156.67,11.28 156.67,11.58 SENSOR2.3 | v19.66,61.42 18.9,62.18 18.9,63.25 U2.19 | v87.63,48.46 87.63,49.23 87.02,49.84 U3.15
  Bottom 0.152: v138.84,53.65 v163.53,28.96 165.05,27.43 165.05,17.22 158.34,10.52 v157.43,10.52 | v19.66,61.42 34.59,61.42 41.15,54.86 81.23,54.86 v87.63,48.46 93.73,54.56 v135.79,54.56
SRC  (via drill 0.35)
  Top 0.152: C4.2 94.03,39.93 94.79,39.17 94.79,38.41 92.05,35.66 89.46,35.66 D5.2 | v70.56,21.64 64.31,21.64 59.74,17.07 59.74,16 59.44,15.7 57,15.7 54.56,13.26 54.56,12.04 54.41,11.89 53.65,11.89 53.34,12.19 53.34,18.75 54.56,19.96 Q3.3 | v88.39,34.59 89.31,35.51 D5.2 | L1.1 83.52,40.39 85.19,38.71 86.26,38.71 89.31,35.66 D5.2
  Bottom 0.152: v70.56,21.64 70.87,21.64 72.39,23.16 76.96,23.16 v88.39,34.59
SS_SD  (via drill 0.35)
  Top 0.152: D8.1 14.48,99.06 13.87,98.45 11.43,98.45 R10.1 v11.43,97.08 | v11.12,47.55 11.12,45.87 U2.4 | v7.16,87.17 6.86,87.48 6.86,87.63 6.25,88.24 J4.P2
  Bottom 0.152: v11.12,47.55 8.69,49.99 8.69,50.14 7.16,51.66 v7.16,87.17 7.62,87.63 7.62,90.68 7.47,90.83 7.47,93.12 v11.43,97.08
TX  (via drill 0.35)
  Top 0.152: v8.08,48.92 8.69,49.53 8.69,53.65 11.28,56.24 11.28,63.25 U2.25 | TP1.TP v8.08,42.37
  Bottom 0.152: v8.08,42.37 v8.08,48.92
USB_D+  (via drill 0.35)
  Top 0.152: v143.26,55.93 148.59,50.6 D1.1 | v41.45,55.93 40.23,55.93 v32,47.7 | v30.18,45.87 24.08,45.87 U2.14
  Bottom 0.152: v41.45,55.93 v143.26,55.93 | v30.18,45.87 v32,47.7
USB_D-  (via drill 0.35)
  Top 0.152: v135.18,48.16 145.24,48.16 145.54,48.46 148.59,48.46 D1.3 | v33.53,48.31 v41.6,48.31 | v25.45,47.24 23.77,47.24 22.71,46.18 22.71,45.87 U2.13
  Bottom 0.152: v135.18,48.16 134.72,48.16 131.83,51.05 91.14,51.05 87.78,47.7 43.28,47.7 43.13,47.55 42.37,47.55 v41.6,48.31 | v33.53,48.31 26.52,48.31 v25.45,47.24
VBAT  (via drill 0.35)
  Top 0.152: U4.2 134.87,53.49 134.87,53.19 U4.3 134.87,53.03 | C2_BAT.1 111.25,47.09 | 133.35,45.57 Q1.3 | 127.1,50.44 MCP73831.3 | 15.24,36.73 TP3.TP
  Top 0.305: Q1.3 133.35,43.13 131.75,41.53 131.49,41.53 130.22,40.26 122.35,40.26 121.08,41.53 119.1,41.53 112.91,47.72 111.88,47.72 111.25,47.09 | 134.87,53.03 134.42,53.03 134.25,52.86 134.25,52.36 134.26,52.34 v134.26,47.7 | 133.35,45.57 v134.26,46.48 | v128.32,50.44 127.1,50.44 | 15.24,36.73 27.74,36.73 30.48,33.98 v61.57,33.98
  Bottom 0.305: v134.26,46.48 v134.26,47.7 131.52,50.44 v128.32,50.44 118.57,40.69 68.58,40.69 61.87,33.98 v61.57,33.98
VBUS  (via drill 0.35)
  Top 0.152: 132.28,43.59 Q1.1 132.28,43.43 | 130.91,52.58 C1_BAT.1 | 150.57,43.28 C4_USB.1 150.57,43.13 | 151.49,49.53 D1.5 | 150.57,45.72 C5_USB.1 | 152.09,36.88 PFMF.050.1.2 | 124.21,50.75 124.36,50.6 MCP73831.4 | 108.81,36.27 109.12,36.58 D2.2 109.27,36.73 | 105.46,36.27 R1_PWRUSB.2 105.31,36.27 | 121.31,50.9 CHG_LED.A
  Top 0.305: 132.28,47.09 132.28,51.21 130.91,52.58 | 132.28,47.09 132.28,43.59 | 150.57,43.28 150.57,45.72 v150.57,47.09 132.28,47.09 | v152.25,48.77 151.49,49.53 | 150.57,43.13 150.57,38.41 152.09,36.88 | 124.21,50.75 121.46,50.75 CHG_LED.A | 108.81,36.27 105.46,36.27 | 105.31,36.27 v100.28,41.3 | 121.31,50.9 121.01,50.9 120.4,51.51 118.11,51.51 | 118.11,51.51 114.44,51.51 109.27,46.35 109.27,36.73 | 132.28,43.43 131.62,43.43 130.15,41.96 130.09,41.9 121.32,41.9 118.1,45.12 118.1,46.29 118.11,46.3 118.11,51.51 | v62.64,31.85 40.49,9.7 14.55,9.7 12.82,11.43 TP14.TP
  Bottom 0.305: v150.57,47.09 v152.25,48.77 | v62.64,31.85 60.96,33.53 60.96,34.29 67.97,41.3 v100.28,41.3
VRTC
  Top 0.152: 86.87,47.09 C8.1 | 85.8,49.84 U3.14 85.8,49.99 | 86.87,63.4 R_CAPACITOR.2 | 97.69,50.9 C10_SUPERCAP.2
  Top 0.305: 86.87,47.19 86.87,47.85 92.15,47.85 95.19,50.9 97.69,50.9 | 86.87,47.19 86.87,47.09 | 86.87,47.19 85.8,48.26 85.8,49.84 | 85.8,49.99 86.42,50.61 86.42,60.36 86.87,60.81 86.87,63.4
VUSB  (via drill 0.3)
  Top 0.127: J2.A4 163.84,51.8 163.84,51.94 J2.B9 163.84,52.08 | J2.A9 163.84,56.78 163.84,56.65 J2.B4 163.84,56.51 | 147.64,36.84 PFMF.050.1.1
  Top 0.152: 161.29,50.8 161.29,50.97
  Top 0.305: 163.84,56.51 164.54,56.51 165.65,55.4 165.65,53.24 164.49,52.08 163.84,52.08 | v149.72,43.49 149.72,38.92 147.64,36.84 | J2.A4 162.59,51.65 161.92,51.59 161.29,50.97 | v162.18,49.14 162.18,49.91 161.29,50.8
  Bottom 0.305: v162.18,49.14 159.64,49.14 153.99,43.49 v149.72,43.49

## Text on the board
tPlace: RX | TX | VBAT | GND | GND | MISO | MOSI | SCK | EPD_BUSY | EPD_RST | EPD_CS | EPD_DC | INT_RTC | VBUS | EPD_3V3_C | 3V3 | EPD_3V3